# Altium PCB A4.PcbDoc (part 1 of 2)
Units mil, origin at the board's own origin, x right, y up, seen from the top; angles counter-clockwise.
Board outline 3937.01 x 3149.61 mil, 2 copper layers (Top Layer, Bottom Layer); 93 components, 53 nets, 268 pads, 22 vias.
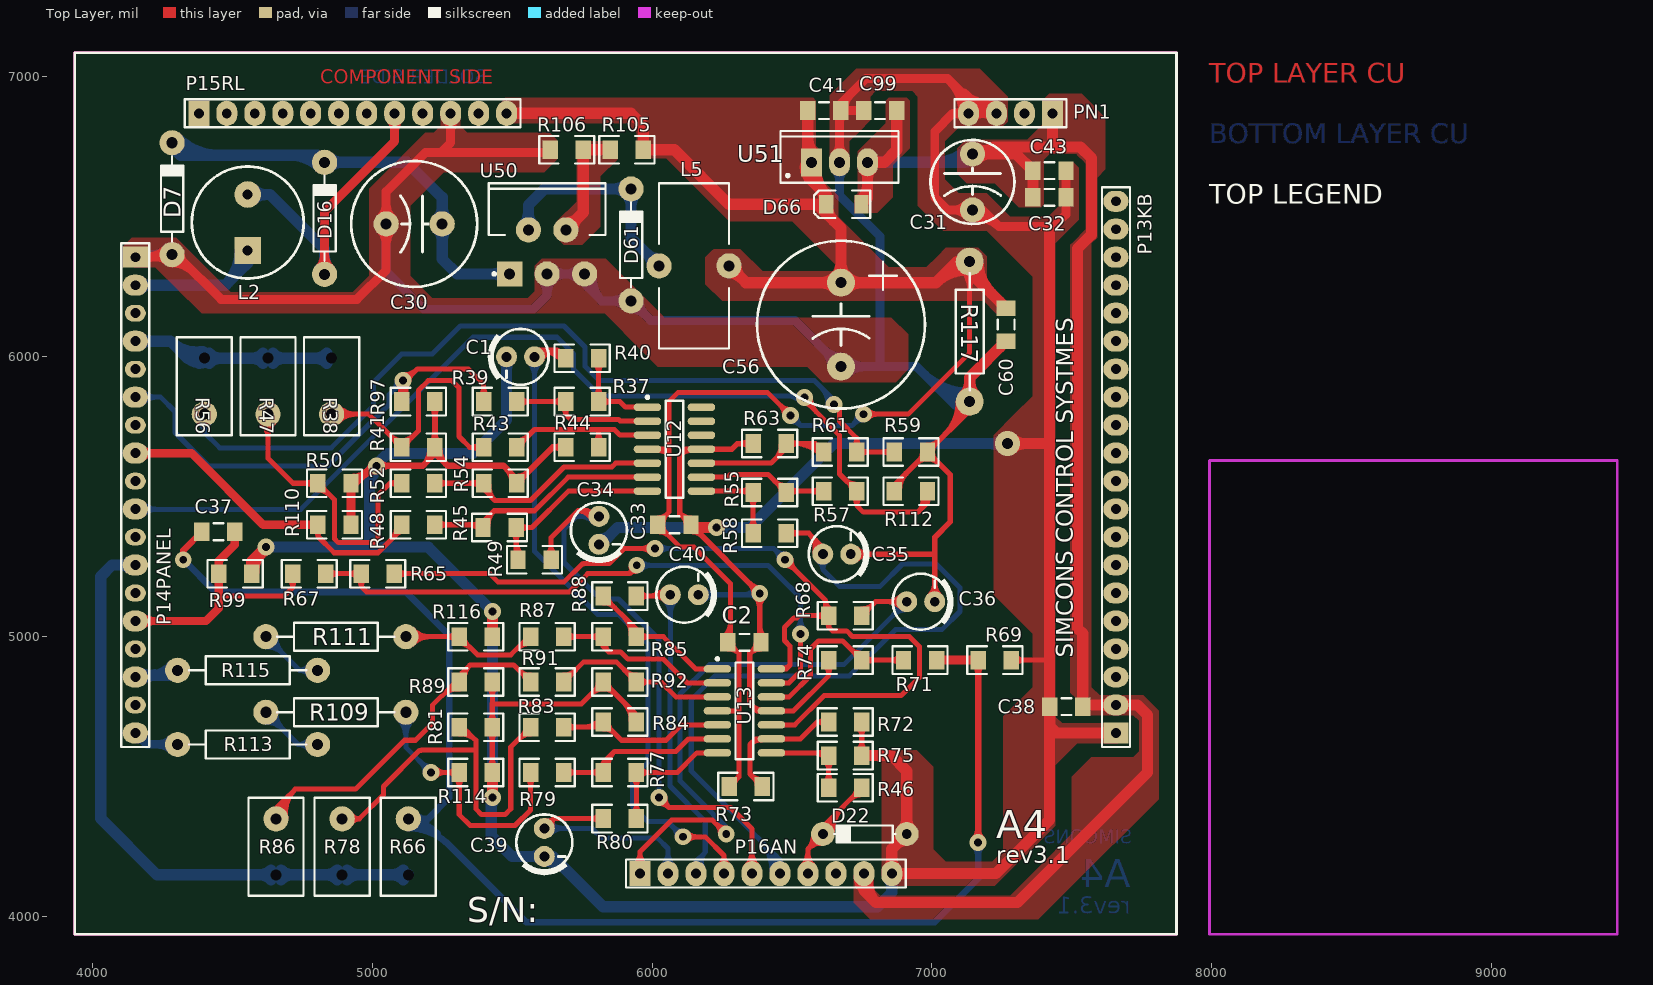
[diagram p0: Top Layer view]
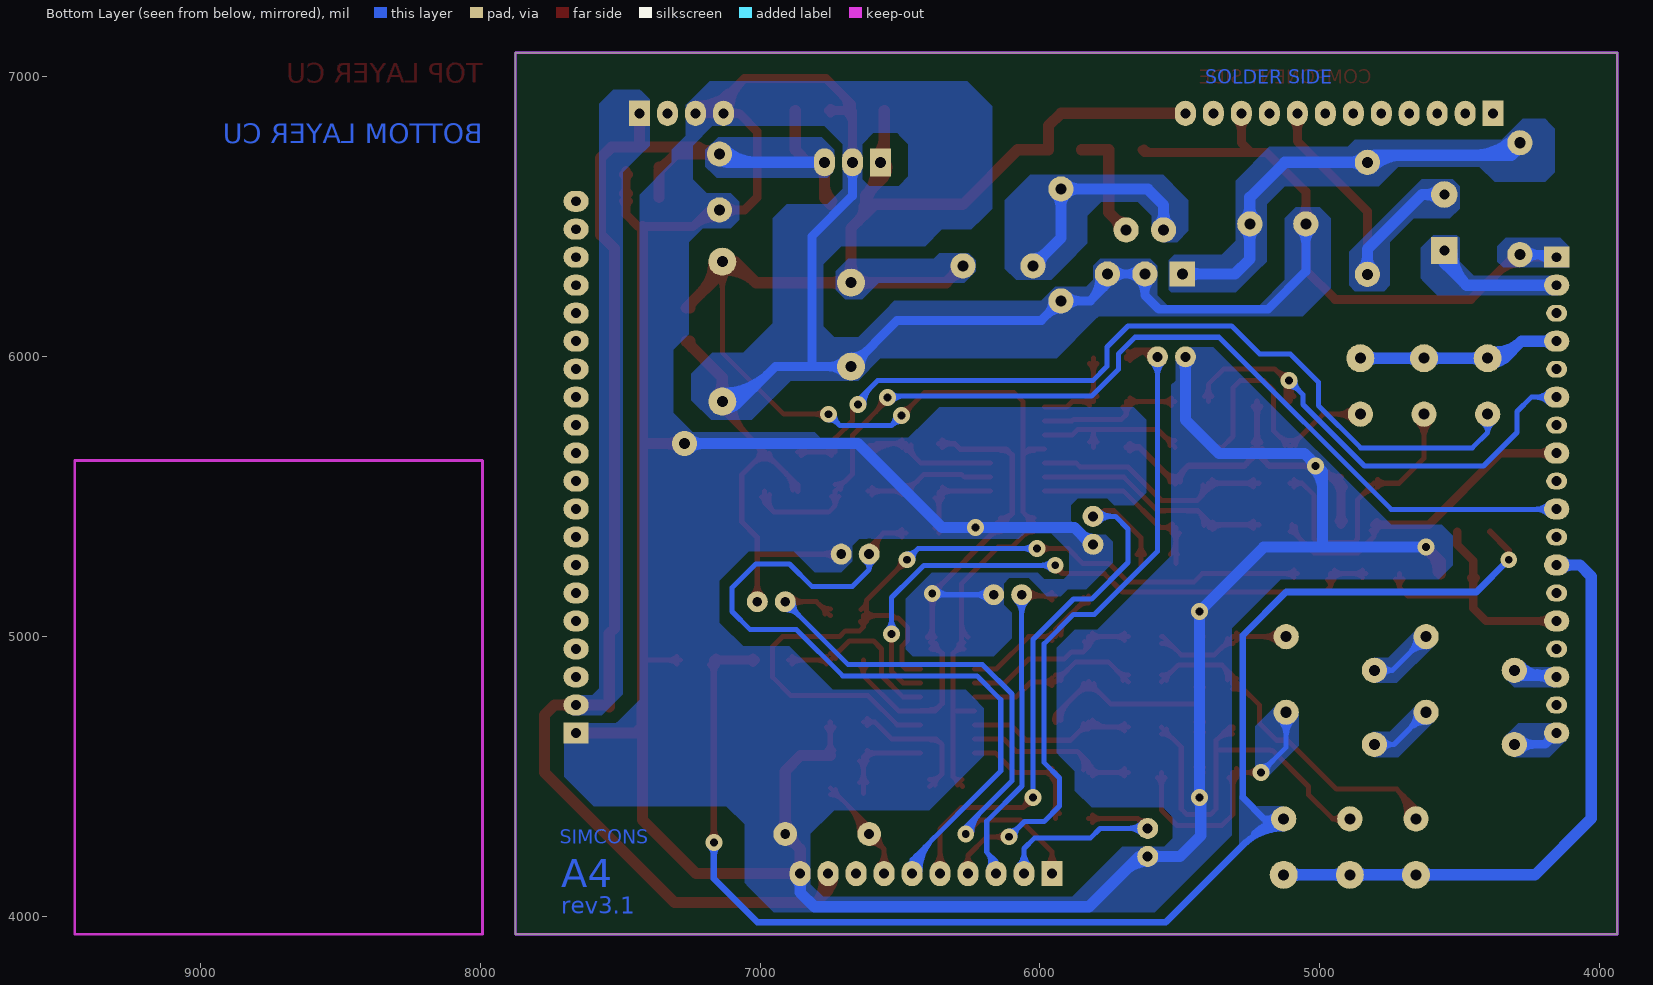
[diagram p1: Bottom Layer view, seen from below]

## Layer stack, top to bottom
Top Solder: solder mask 0.4, Solder Resist, Dk 3.5
Top Layer: signal copper 1.4
Dielectric1: dielectric 12.6, FR-4, Dk 4.8
Bottom Layer: signal copper 1.4
Bottom Solder: solder mask 0.4, Solder Resist, Dk 3.5

## Board outline
3937.01,3937.01 7874.02,3937.01 7874.02,7086.61 3937.01,7086.61

## Design rules (kind name [scope] priority, off if disabled: settings)
Clearance [All] p1: gap=18 ignorepadtopadclearanceinfootprint=FALSE except(0: Arc-Hole Track-Hole SMDPad-Hole THPad-Hole Via-Hole Fill-Hole Poly-Hole Region-Hole Text-Hole)
ComponentClearance [All] p1 off: gap=10 collisioncheckmode=3 verticalgap=10 showdistances=FALSE
Height [All] p1 off: minheight=0 maxheight=1000 prefheight=500
MinimumSolderMaskSliver [All] p1: minsoldermaskwidth=0
PlaneConnect [All] p1: planeconnectstyle=Relief reliefexpansion=20 reliefentries=4 reliefconductorwidth=22 reliefairgap=8
PolygonConnect [All] p1: connectstyle=Direct reliefconductorwidth=10 reliefentries=4 polygonreliefangle="90 Angle" airgapwidth=10
RoutingVias [All] p1: holewidth=35.43 width=60 viastyle="Through Hole" minholewidth=28 minwidth=60 maxholewidth=59.06 maxwidth=90
SilkToSilkClearance [All] p1: silktosilkclearance=0
SilkToSolderMaskClearance SilkscreenOverComponentPads [IsPad] p1: minsilkscreentomaskgap=0 clearancetoexposedcopper=TRUE
SolderMaskExpansion [All] p1: expansion=4
Width [All] p1: maxlimit=40 minlimit=18 preferedwidth=18
24 further rules are at their usual default settings.

## Classes and differential pairs
component class SUPPLY: "1K 1206" C30 C31 C32 C43 C56 C60 C99 D7 D16 D61 D66 L2 L5 R105 R106 R117 U50 U51
component class BOTTOM: C41 P13KB P14PANEL P15RL P16AN PN1
component class AC: C1 C33 C34 C35 R37 R38 R39 R40 R41 R43 R44 R45 R47 R48 R49 R50 R52 R54 R55 R56 R57 R58 R59 R61 R63 R97 R110 R112 U12
component class AC2: C2 C36 C37 C38 C39 C40 D22 R46 R65 R66 R67 R68 R69 R71 R72 R73 R74 R75 R77 R78 R79 R80 R81 R83 R84 R85 R86 R87 R88 R89 R91 R92 R99 R109 R111 R113 R114 R115 R116 U13

## Components (designator, comment, footprint, x,y, rotation, side; value= is the part's Value field where it differs from the comment)
C1 "10uF/63V" CAP_.1 5530,6000 r270 top value=100pF
C2 ".1uF 1206" C1206VW 6330,4980 r180 top value=100pF
C30 "Cap Electrolitic 1000uF/50V" CAP_.2-2 5150,6475 r270 top value=330uF
C31 "Cap Electrolytic 470uF/16V" CAP_.2 7145,6625 r0 top value=100uF
C32 ".1uF 1206" C1206VW 7420,6570 r180 top value=100nF
C33 ".1uF 1206" C1206VW 6080,5400 r180 top value=100pF
C34 "10uF/63V" CAP_.1 5810,5380 r0 top value=100pF
C35 "10uF/63V" CAP_.1 6660,5295 r90 top value=100pF
C36 "10uF/63V" CAP_.1 6960,5125 r90 top value=100pF
C37 "22nF 1206" C1206VW 4450,5375 r0 top value=100pF
C38 ".1uF 1206" C1206VW 7480,4750 r0 top value=100pF
C39 "10uF/63V" CAP_.1 5615,4265 r0 top value=100pF
C40 "10uF/63V" CAP_.1 6115,5150 r90 top value=100pF
C41 ".1uF 1206" C1206VW 6615,6880 r180 top value=100pF
C43 "1uF 1206" C1206VW 7420,6665 r180 top value=100nF
C56 "Cap Electrolitic 3300uF/16V" CAP_.3 6675,6115 r0 top value=330uF
C60 ".1uF 1206" C1206VW 7265,6115 r90 top value=100nF
C99 ".1uF 1206" C1206VW 6815,6880 r0 top value=100pF
D7 "P6KE33A x 2" DIODE1A 4285,6565 r90 top
D16 "1N4007" DIODE1A 4830,6495 r90 top
D22 "D Zener 4.7V .25W" "DZENOR .25W" 6760,4295 r180 top
D61 "1N5819" DIODE1A 5925,6400 r90 top
D66 "1N4148 SMD" 4148SMD 6685,6545 r0 top
L2 "Inductor 220uH" INDUCTOR 4555,6480 r180 top value=4.7mH
L5 "Inductor Toroid 1mH" INDUCTORTOROID 6150,6325 r90 top value=10mH
P13KB "Header 20" HDR1X20_BURGE_F 7657.48,4655.91 r90 top locked
P14PANEL "Header 18" HDR1X18_BURGE_F 4153.54,6355.91 r270 top locked
P15RL "Header 12" HDR1X12_BURGE_F 4380.31,6870.08 r0 top locked
P16AN "Header 10" HDR1X10_BURGE_F 5956.69,4153.54 r0 top locked
PN1 "Header 4" HDR1X4_BURGE_F 7430.71,6870.08 r180 top locked
R37 "1M 1206" R1206VW 5750,5840 r180 top value=1k
R38 "1M MFR" RES_RAD_1W 4855,5795 r270 top value=1M
R39 "220K 1206" R1206VW 5457.5,5840 r180 top value=1k
R40 "33K 1206" R1206VW 5750,5995 r0 top value=1k
R41 "4.7K 1206" R1206VW 5165,5676.67 r0 top value=1k
R43 "220K 1206" R1206VW 5457.5,5676.67 r180 top value=1k
R44 "1M 1206" R1206VW 5750,5676.67 r0 top value=1k
R45 "1M 1206" R1206VW 5455,5390 r180 top value=1k
R46 "470E 1206" R1206VW 6690,4460 r0 top value=1k
R47 "1M MFR" RES_RAD_1W 4627.5,5795 r270 top value=1M
R48 "220K 1206" R1206VW 5165,5400 r180 top value=1k
R49 "33K 1206" R1206VW 5580,5275 r180 top value=1k
R50 "4.7K 1206" R1206VW 4865,5548.33 r0 top value=1k
R52 "220K 1206" R1206VW 5165,5548.33 r180 top value=1k
R54 "1M 1206" R1206VW 5457.5,5548.33 r180 top value=1k
R55 "1M 1206" R1206VW 6420,5515 r0 top value=1k
R56 "1M MFR" RES_RAD_1W 4400,5795 r270 top value=1M
R57 "220K 1206" R1206VW 6672.5,5520 r0 top value=1k
R58 "33K 1206" R1206VW 6420,5370 r180 top value=1k
R59 "4.7K 1206" R1206VW 6925,5660 r0 top value=1k
R61 "220K 1206" R1206VW 6672.5,5660 r0 top value=1k
R63 "1M 1206" R1206VW 6420,5690 r0 top value=1k
R65 "1M 1206" R1206VW 5020,5225 r180 top value=1k
R66 "1M MFR" RES_RAD_1W 5128.82,4349.13 r90 top value=1M
R67 "220K 1206" R1206VW 4775,5225 r180 top value=1k
R68 "33K 1206" R1206VW 6690,5075 r180 top value=1k
R69 "4.7K 1206" R1206VW 7225,4916.25 r0 top value=1k
R71 "220K 1206" R1206VW 6957.5,4916.25 r0 top value=1k
R72 "1K 1206" R1206VW 6690,4695 r0 top value=1k
R73 "10K 1206" R1206VW 6335,4465 r0 top value=1k
R74 "1M 1206" R1206VW 6690,4916.25 r0 top value=1k
R75 "10K 1206" R1206VW 6690,4575 r0 top value=1k
R77 "1M 1206" R1206VW 5885,4515 r180 top value=1k
R78 "1M MFR" RES_RAD_1W 4892.6,4349.13 r90 top value=1M
R79 "220K 1206" R1206VW 5625,4515 r180 top value=1k
R80 "33K 1206" R1206VW 5885,4350 r0 top value=1k
R81 "4.7K 1206" R1206VW 5370,4676.67 r0 top value=1k
R83 "220K 1206" R1206VW 5625,4676.67 r180 top value=1k
R84 "1M 1206" R1206VW 5885,4695 r180 top value=1k
R85 "1M 1206" R1206VW 5885,5000 r180 top value=1k
R86 "1M MFR" RES_RAD_1W 4656.38,4349.13 r90 top value=1M
R87 "220K 1206" R1206VW 5625,5000 r180 top value=1k
R88 "33K 1206" R1206VW 5885,5145 r180 top value=1k
R89 "4.7K 1206" R1206VW 5370,4838.33 r0 top value=1k
R91 "220K 1206" R1206VW 5625,4838.33 r180 top value=1k
R92 "1M 1206" R1206VW 5885,4838.33 r0 top value=1k
R97 "4.7K 1206" R1206VW 5165,5840 r180 top value=100
R99 "4.7K 1206" R1206VW 4510,5225 r180 top value=100
R105 "18K 1206" R1206VW 5910,6740 r0 top value=1K
R106 "4.7K 1206" R1206VW 5695,6740 r0 top value=1.1K
R109 "MFR 1M .5W" AXIAL-0.5#1 4870,4730 r0 top value=100K
R110 "4.7K 1206" R1206VW 4865,5400 r180 top value=100
R111 "MFR 1M .5W" AXIAL-0.5#1 4870,5000 r0 top value=100K
R112 "4.7K 1206" R1206VW 6925,5520 r0 top value=100
R113 "MFR 1M .5W" AXIAL-0.5#1 4555,4615 r0 top value=100K
R114 "4.7K 1206" R1206VW 5370,4515 r180 top value=100
R115 "MFR 1M .5W" AXIAL-0.5#1 4555,4880 r0 top value=100K
R116 "4.7K 1206" R1206VW 5370,5000 r180 top value=100
R117 "MFR 220E .5W" AXIAL-0.5#2 7135,6090 r90 top value=1K
U12 "LM324AD" D014_M 6080,5670 r0 top
U13 "LM324AD" D014_M 6330,4735 r0 top
U50 "LM2576T-ADJ" T05D 5625,6375 r0 top
U51 "LM2940CT-5.0" T03B 6670,6695 r0 top

## Footprints (in the part's own frame and the unit in brackets; to place one, negate y for a bottom-side part, rotate by r counter-clockwise, add the part's x,y. Pads: shape width x height; smd on the part's side, far side on the other; paste and mask are expansions set on the pad)
4148SMD [mm] "Diode 250mA"
  rect 1.3x1.7 smd: 1(1.6,0) 2(-1.6,0)
  silkscreen extent -2.7,-1.25 2.4,1.25, body extent -1.78,-0.76 1.91,0.76, height 1.52
AXIAL-0.5#1 [mil] "Axial Device, Thru-Hole; 2 Leads; 0.5 in Pin Spacing"
  round 90 hole 39.37: 1(-250,0) 2(250,0)
  silkscreen extent -210,-50 210,50, body extent -270,-51 270,51, height 106
AXIAL-0.5#2 [mil] "Axial Device, Thru-Hole; 2 Leads; 0.5 in Pin Spacing"
  round 100 hole 39.37: 1(-250,0) 2(250,0)
  silkscreen extent -210,-50 210,50, body extent -270,-51 270,51, height 106
C1206VW [mm] "Chip Capacitor, Body 3.2x1.6mm, IPC High Density"
  rect 1.4x1.7 smd: 1(-1.5,0) 2(1.5,0)
  silkscreen extent -0.44,-0.76 0.44,0.76, body extent -1.6,-0.8 1.6,0.8, height 1
CAP_.1 [mm]
  round 1.905 hole 0.9: 1(0,1.27) 2(0,-1.27)
  silkscreen extent -2.54,-2.79 2.54,2.54, body extent -2.54,-2.54 2.54,2.54, height 12.7
CAP_.2 [mil]
  round 90 hole 39.37: 1(0,100) 2(0,-100)
  silkscreen extent -150,-150 150,150, body extent -157,-157 157,157, height 462
CAP_.2-2 [mil]
  round 90 hole 39.37: 1(0,100) 2(0,-100)
  silkscreen extent -225,-225 225,225, body extent -199,-200 199,198, height 520
CAP_.3 [mm]
  round 2.54 hole 1: 1(0,3.81) 2(0,-3.81)
  silkscreen extent -7.62,-7.62 7.62,7.62, body extent -8.23,-8.25 8.23,8.23, height 26.2
D014_M [mm] "SOIC, 14-Leads, Body 8.7x3.9mm, Pitch 1.27mm, IPC Low Density"
  oval 2.5x0.7 smd: 1(-2.45,3.81) 2(-2.45,2.54) 3(-2.45,1.27) 4(-2.45,0) 5(-2.45,-1.27) 6(-2.45,-2.54) 7(-2.45,-3.81) 8(2.45,-3.81) 9(2.45,-2.54) 10(2.45,-1.27) 11(2.45,0) 12(2.45,1.27) 13(2.45,2.54) 14(2.45,3.81)
  silkscreen extent -2.57,-4.4 0.8,4.83, body extent -2.92,-4.28 2.88,4.27, height 1.75
DIODE1A [mil] "DIODE 1 AMPERE"
  round 90 hole 39.37: 1(-200,0) 2(200,0)
  silkscreen extent -152,-40 152,40, body extent -216,-39 216,39, height 82
"DZENOR .25W" [mil] "Axial Device, Thru-Hole; 2 Leads; 0.3 in Pin Spacing"
  round 85 hole 35.43: 1(-150,0) 2(150,0)
  silkscreen extent -109,-30 109,30, body extent -164,-35 163,35, height 74
HDR1X4_BURGE_F [mil] "Connector; Header; 4 Position"
  rect 75x90 hole 35.43: 1(0,0)
  oval 75x90 hole 35.43: 2(100,0) 3(200,0) 4(300,0)
  silkscreen extent -50,-50 350,50, body extent -50,-50 350,50, height 237
HDR1X10_BURGE_F [mil] "Connector; Header; 10 Position"
  rect 75x90 hole 35.43: 1(0,0)
  oval 75x90 hole 35.43: 2(100,0) 3(200,0) 4(300,0) 5(400,0) 6(500,0) 7(600,0) 8(700,0) 9(800,0) 10(900,0)
  silkscreen extent -50,-50 950,50, body extent -50,-50 950,50, height 237
HDR1X12_BURGE_F [mil] "Connector; Header; 12 Position"
  rect 75x90 hole 35.43: 1(0,0)
  oval 75x90 hole 35.43: 2(100,0) 3(200,0) 4(300,0) 5(400,0) 6(500,0) 7(600,0) 8(700,0) 9(800,0) 10(900,0) 11(1000,0) 12(1100,0)
  silkscreen extent -50,-50 1150,50, body extent -50,-50 1150,50, height 237
HDR1X18_BURGE_F [mil] "Connector; Header; 18 Position"
  rect 75x90 hole 35.43: 1(0,0)
  oval 75x90 hole 35.43: 2(100,0) 4(300,0) 6(500,0) 8(700,0) 10(900,0) 12(1100,0) 14(1300,0) 16(1500,0) 18(1700,0)
  oval 60x75 hole 35.43: 3(200,0) 5(400,0) 7(600,0) 9(800,0) 11(1000,0) 13(1200,0) 15(1400,0) 17(1600,0)
  silkscreen extent -50,-50 1750,50, body extent -50,-50 1750,50, height 237
HDR1X20_BURGE_F [mil] "Connector; Header; 20 Position"
  rect 75x90 hole 35.43: 1(0,0)
  oval 75x90 hole 35.43: 2(100,0) 3(200,0) 4(300,0) 5(400,0) 6(500,0) 7(600,0) 8(700,0) 9(800,0) 10(900,0) 11(1000,0) 12(1100,0) 13(1200,0) 14(1300,0) 15(1400,0) 16(1500,0) 17(1600,0) 18(1700,0) 19(1800,0) 20(1900,0)
  silkscreen extent -50,-50 1950,50, body extent -50,-50 1950,50, height 237
INDUCTOR [mil] "IRON CORE INDUCTOR"
  rect 95x95 hole 35.43: 1(0,100)
  round 95 hole 35.43: 2(0,-100)
  silkscreen extent -200,-200 200,200, body extent -197,-197 197,197, height 478
INDUCTORTOROID [mil] "TOROID INDUCTOR"
  round 90 hole 39.37: 1(0,125) 2(0,-125)
  silkscreen extent -295,-125 295,125, body extent -339,-132 344,132, height 140
R1206VW [mm] "Chip Capacitor, Body 3.2x1.6mm, IPC High Density"
  rect 1.4x1.7 smd: 1(-1.5,0) 2(1.5,0)
  silkscreen extent -2.5,-1.25 2.5,1.25, body extent -1.59,-0.77 1.59,0.77, height 0.63
RES_RAD_1W [mil]
  round 0 / inner round 90 / far side round 100 hole 39.37: 1(-200,0)
  round 90 hole 39.37: 2(0,0)
  silkscreen extent -275,-98 75,98, body extent -302,-102 102,102, height 811
T03B [mm] "TO, Thru-Hole, Vertical, Heatsink Mounted; 3 In-Line Leads; Pitch 2.54 mm"
  rect 1.905x2.54 hole 1: 1(-2.54,0)
  oval 1.905x2.54 hole 1: 2(0,0) 3(2.54,0)
  silkscreen extent -5.35,-1.85 5.35,2.85, body extent -5.4,-1.9 5.4,2.9, height 19.4
T05D [mm] "TO, Thru-Hole, Vertical, Heatsink Mounted; 5 Bent Staggered Leads; Body 10.3x8.6x4.6mm, Pitch 1.7 mm"
  rect 2.286x2.286 hole 1: 1(-3.4,-2)
  round 2.286 hole 1: 2(-1.7,2) 3(0,-2) 4(1.7,2) 5(3.4,-2)
  silkscreen extent -5.3,-2.12 5.3,6.23, body extent -5.35,-2.31 5.35,6.28, height 21.1

## Part data
C1 C34 C35 C36 C39 C40: library part "Cap Pol1", "Polarized Capacitor (Radial)", LatestRevisionDate=17-Jul-2002, LatestRevisionNote="Re-released for DXP Platform.", PackageDescription="Polarized Capacitor (Radial); 2 Leads", PackageReference=RB7.6-15, Published=8-Jun-2000, Publisher="Altium Limited"
C2 C32 C33 C37 C38 C41 C43 C99: library part Cap, "Capacitor", LatestRevisionDate=17-Jul-2002, LatestRevisionNote="Re-released for DXP Platform.", PackageDescription="Radial Cap, Thru-Hole; 2 Leads; 0.3 in Pin Spacing", PackageReference=RAD-0.3, Published=8-Jun-2000, Publisher="Altium Limited"
C30 C31 C56: library part Cap2, "Capacitor", PackageReference=CAPR5-4X5, Published=23-Sep-2002, Publisher="Altium Limited"
C60: library part CAP, "Capacitor", LatestRevisionDate=17-Jul-2002, LatestRevisionNote="Re-released for DXP Platform.", PackageDescription="Radial Cap, Thru-Hole; 2 Leads; 0.3 in Pin Spacing", PackageReference=RAD-0.3, Published=8-Jun-2000, Publisher="Altium Limited"
D7 D16: library part "Diode 1N5408", "3 Amp Medium Power Silicon Rectifier Diode", ComponentLink1Description="Manufacturer Link", ComponentLink1URL=http://www.irf.com/, DatasheetVersion=Aug-1984, LatestRevisionDate=17-Jul-2002, LatestRevisionNote="Re-released for DXP Platform.", PackageDescription="Diode, Axial; Body 9.5 x 5.3 mm (LxDia. max), Lead Dia. 1.32 mm (max)", PackageReference=DO-201AD, Published=8-Jun-2000, Publisher="Altium Limited"
D22: library part "D Zener", "Zener Diode", LatestRevisionDate=17-Jul-2002, LatestRevisionNote="Re-released for DXP Platform.", PackageDescription="Diode, Thru-Hole; 2 Leads; 0.7 in Pin Spacing", PackageReference=DIODE-0.7, Published=8-Jun-2000, Publisher="Altium Limited"
D61: library part 1N5221B, "Silicon Zener Diode (0.3 to 0.5W)", Code_JEDEC=DO-204-AH, ComponentLink1Description="Manufacturer Link", ComponentLink1URL=http://www.vishay.com/, ComponentLink2Description=Datasheet, ComponentLink2URL=http://www.vishay.com/docs/85588/85588.pdf, DatasheetDocument=6-Aug-1999, LatestRevisionDate=17-Jul-2002, LatestRevisionNote="Re-released for DXP Platform.", PackageReference=DO-35, Published=8-Jun-2000, Publisher="Altium Limited"
D66: library part "Diode 1N5408", "Small Signal Fast Switching Diode", ComponentLink1Description="Manufacturer Link", ComponentLink1URL=http://www.irf.com/, DatasheetVersion=Aug-1984, LatestRevisionDate=17-Jul-2002, LatestRevisionNote="Re-released for DXP Platform.", PackageDescription="Diode, Axial; Body 9.5 x 5.3 mm (LxDia. max), Lead Dia. 1.32 mm (max)", PackageReference=DO-201AD, Published=8-Jun-2000, Publisher="Altium Limited"
L2 L5: library part Inductor, "Inductor", Code_IEC=1005, Code_JEITA=0402, LatestRevisionDate=29-May-2009, LatestRevisionNote="IPC-7351 Footprint Added.", PackageDescription="Chip Inductor", PackageReference=0402-A, Published=8-Jun-2000, Publisher="Altium Limited"
P13KB: "Header, 20-Pin", LatestRevisionDate=17-Jul-2002, LatestRevisionNote="Re-released for DXP Platform.", Publisher="Altium Limited"
P14PANEL: "Header, 18-Pin", LatestRevisionDate=17-Jul-2002, LatestRevisionNote="Re-released for DXP Platform.", Publisher="Altium Limited"
P15RL: "Header, 12-Pin", LatestRevisionDate=17-Jul-2002, LatestRevisionNote="Re-released for DXP Platform.", Publisher="Altium Limited"
P16AN: "Header, 10-Pin", LatestRevisionDate=17-Jul-2002, LatestRevisionNote="Re-released for DXP Platform.", Publisher="Altium Limited"
PN1: "Header, 4-Pin", LatestRevisionDate=17-Jul-2002, LatestRevisionNote="Re-released for DXP Platform.", Publisher="Altium Limited"
R37 R38 R39 R40 R41 R43 R44 R45 R46 R47 R48 R49 R50 R52 R54 R55 R56 R57 R58 R59 R61 R63 R65 R66 R67 R68 R69 R71 R72 R73 R74 R75 R77 R78 R79 R80 R81 R83 R84 R85 R86 R87 R88 R89 R91 R92 R97 R99 R109 R110 R111 R112 R113 R114 R115 R116 R117: library part "Res Semi", "Semiconductor Resistor", LatestRevisionDate=17-Jul-2002, LatestRevisionNote="Re-released for DXP Platform.", PackageDescription="Axial Device, Thru-Hole; 2 Leads; 0.5 in Pin Spacing", PackageReference=AXIAL-0.5, Published=8-Jun-2000, Publisher="Altium Limited"
R105 R106: library part "Res SMT", "Semiconductor Resistor", LatestRevisionDate=17-Jul-2002, LatestRevisionNote="Re-released for DXP Platform.", PackageDescription="Axial Device, Thru-Hole; 2 Leads; 0.5 in Pin Spacing", PackageReference=AXIAL-0.5, Published=8-Jun-2000, Publisher="Altium Limited"
U12 U13: "Quadruple Operational Amplifier", Code_IPC=SOIC127P600-14, ComponentLink1Description="Manufacturer Link", ComponentLink1URL=http://www.ti.com/, ComponentLink2Description=Datasheet, ComponentLink2URL=http://www-s.ti.com/sc/ds/lm324.pdf, DatasheetVersion=Jan-1989, LatestRevisionDate=13-Apr-2006, LatestRevisionNote="IPC-7351 Footprint Added.", PackageDescription="14-Pin Small Outline Integrated Circuit 1.27 mm Pitch", PackageReference=D014, PackageVersion=Jan-1998, Published=15-Apr-2002, Publisher="Altium Limited"
U50: "SIMPLE SWITCHER® 3A Step-Down Voltage Regulator, 5-pin TO-220", Manufacturer="National Semiconductor", PackageTopMarking="NSUZXYTTE#*LM2576T*-ADJ P+", PowerWise=N, Supplier Part Number 1=9488146, Code_JEDEC=TO-220-AB, ComponentLink1Description="LM2576 Datasheet", ComponentLink1URL=http://www.national.com/ds/LM/LM2576.pdf, ComponentLink2Description="LM2576 Web Page", ComponentLink2URL=http://www.national.com/pf/LM/LM2576.html, ComponentLink3Description="T05A Package Page", ComponentLink3URL=http://www.national.com/packaging/folders/t05a.html, CompType=Switcher, DatasheetVersion=Aug-2004, PackageDescription="TO-220, Molded, 5 Lead, Straight", PackageReference=T05A, PackageVersion="revJ, Jan-1992", PartNumber=LM2576T-ADJ, PinCount=5, Published=4-Dec-2008, Publisher="Altium Limited", RoHS=N, Supplier 1=Farnell
U51: "1A Low Dropout Regulator, 3-pin TO-220", Manufacturer="National Semiconductor", PackageTopMarking="NSUZXYTTE#*LM2940CT*-5.0 P+", PowerWise=N, Supplier Part Number 1=9490191, ComponentLink1Description="LM2940C Datasheet", ComponentLink1URL=http://www.national.com/ds/LM/LM2940C.pdf, ComponentLink2Description="LM2940C Web Page", ComponentLink2URL=http://www.national.com/pf/LM/LM2940C.html, ComponentLink3Description="T03B Package Page", ComponentLink3URL=http://www.national.com/packaging/folders/t03b.html, CompType="LDO IC", DatasheetVersion=Jan-2007, PackageDescription="TO-220, Molded, 3 Lead, Straight", PackageReference=T03B, PackageVersion="revL, Jan-1992", PartNumber=LM2940CT-5.0, PinCount=3, Published=4-Dec-2008, Publisher="Altium Limited", RoHS=N, Supplier 1=Farnell, Supplier 2=Farnell, Supplier Part Number 2=1523853

## Via types
v1: diameter 60, hole 28, Top Layer to Bottom Layer, 21 vias
v2: diameter 90, hole 39.37, Top Layer to Bottom Layer, 1 vias

## Nets (pads, with @x,y where several pads share a name; then routed paths per layer and width w, separated by ;. In a path a pad name is that pad's centre, name@x,y a point inside that pad or via, vN(x,y) a via of type N, cw(c..) or ccw(c..) an arc to the next point about the centre after c; other vN are vias at no path point)
+9V: C2.2 C33.2 C41.2 C56.1 C60.2 D66.2 L5.2 P15RL.12 R73.1 R105.2 R117.2 U12.4 U13.4 U51.1 | length 8629.3
  Top Layer w18: U12.4@5983.54,5670 6040,5670 6059.76,5650.24 ; U12.4@6019.34,5665.23 cw(c6023.22,5613.71) 6059.75,5650.25 ; C33.2@6020.94,5375.54 cw(c6020.94,5316.47) 6062.71,5358.24 ; C33.2@6020.94,5424.46 ccw(c6020.94,5469.18) 6052.56,5437.56 ; C33.2@6039.5,5394.09 ccw(c6070.05,5394.09) C33.2@6048.45,5372.49 ; C33.2@6039.5,5405.91 cw(c6084.4,5405.91) 6052.65,5437.65 ; U13.4@6233.54,4735 6305,4735 6310,4740 ; C2.2@6257.82,4999.03 ccw(c6203.14,5053.71) 6280.47,5053.71 ; C2.2@6270.94,4980 C2.2@6280.47,4970.47 ; C2.2@6271.92,4955.56 cw(c6274.55,4905.5) 6310,4940.95 ; R73.1@6275.94,4465 6310,4499.06 ; R73.1@6279.06,4489.2 ccw(c6285,4524.06) 6310,4499.05 ; C2.2@6289.5,4974.09 ccw(c6320.05,4974.09) C2.2@6298.45,4952.49 ; R73.1@6294.5,4470.91 cw(c6325.05,4470.91) R73.1@6303.45,4492.51 ; v1@6474,5790 ccw(c6423.3,5790) 6459.15,5825.85 ccw(c6495,5861.7) v1@6495,5811 ; v1(6495,5790) 6412,5873 6277,5873 6250,5873 6093,5873 6059.76,5839.76 6059.76,5650.24 ; v1(6755,5795) 6915,5795 7135,6015 7135,6304.06 R117.2@7135,6340 ; v1@6769.85,5780.15 cw(c6805.7,5744.3) 6805.7,5795 cw(c6805.7,5845.7) v1@6769.85,5809.85 ; R117.2@7106.01,6311.01 cw(c7036.02,6241.02) 7135,6241.02 cw(c7233.98,6241.02) R117.2@7163.99,6311.01 ; R117.2@7118.74,6323.74 cw(c7079.47,6284.47) 7135,6284.47 cw(c7190.53,6284.47) R117.2@7151.26,6323.74 ; 6059.76,5650.24 6059.76,5444.76 6020.94,5405.94 C33.2@6020.94,5400 6100.94,5320 6150,5320 6280.47,5189.53 C2.2@6280.47,4970.47 ; C2.2@6280.47,4970.47 6310,4940.94 ; 6310,4499.06 6310,4740 ; 6310,4740 6310,4940.94
  Top Layer w40: P15RL.12@5480.32,6870.08 5924.92,6870.08 5969.06,6825.94 R105.2@5969.06,6740 6080,6740 6275,6545 6590,6545 ; P15RL.12@5492.69,6857.7 cw(c5522.56,6827.83) 5522.56,6870.08 cw(c5522.56,6912.33) P15RL.12@5492.69,6882.45 ; L5.2@6275,6300 cw(c6275,6239.64) 6317.68,6282.32 cw(c6360.36,6325) L5.2@6300,6325 ; L5.2@6275,6325 6335,6265 C56.1@6675,6265 ; U51.1@6547.69,6685.45 ccw(c6607,6677.6) 6564.7,6635.3 ; 6555.94,6783.68 ccw(c6646.18,6783.68) U51.1@6582.37,6719.87 ; C41.2@6555.94,6880 6555.94,6709.06 U51.1@6570,6695 6570,6630 D66.2@6622.01,6577.99 ; U51.1@6557.63,6670.13 cw(c6527.75,6640.25) 6570,6640.25 cw(c6612.25,6640.25) U51.1@6582.37,6670.13 ; U51.1@6587.35,6680.2 ccw(c6708.21,6664.21) D66.2@6622,6578 ; 6594.7,6605.3 cw(c6542.28,6552.87) D66.2@6616.42,6552.87 ; D66.2@6619,6541.84 cw(c6606.47,6561.47) 6590,6545 ; D66.2@6627.6,6537.13 ccw(c6699.36,6537.13) 6648.62,6486.38 ; C56.1@6653.79,6243.79 ccw(c6602.57,6192.57) 6602.57,6265 ccw(c6602.57,6337.43) 6653.79,6286.21 ccw(c6602.57,6337.43) 6675,6337.43 ccw(c6747.43,6337.43) 6696.21,6286.21 ccw(c6747.43,6337.43) 6747.43,6265 ccw(c6747.43,6192.57) C56.1@6696.21,6243.79 ; 7078.09,6328.09 cw(c7131.25,6274.93) R117.2@7135.58,6349.98 ; R117.2@7133.27,6310.05 ccw(c7124.37,6155.64) 7015,6265 ; R117.2@7135,6304.06 C60.2@7265,6174.06 ; R117.2@7135,6340 7090,6340 7015,6265 ; R117.2@7165,6340 ccw(c7324.2,6340) 7211.63,6227.43 ; C60.2@7242.01,6197.04 cw(c7219.03,6174.06) C60.2@7251.54,6174.06 ; 6590,6545 6675,6460 C56.1@6675,6265 ; 6590,6545 D66.2@6622.01,6545 D66.2@6622.01,6577.99 ; C56.1@6675,6265 7015,6265
  Bottom Layer w18: v1(6495,5790) 6530,5755 ; v1@6495.36,5769 cw(c6496.18,5721.18) 6530,5755 ; v1@6516,5789.64 ccw(c6563.82,5788.82) 6530,5755 ; v1@6734,5795 cw(c6683.3,5795) 6719.15,5759.15 cw(c6755,5723.3) v1@6755,5774 ; v1(6755,5795) 6715,5755 6530,5755
B_M: P14PANEL.10 R57.2 R112.2 | length 4128.2
  Top Layer w18: v1@6545,5834 cw(c6545,5807.44) 6563.78,5826.22 ; v1(6545,5855) 6540,5850 6670,5720 6670,5581.56 R57.2@6731.56,5520 6731.56,5468.44 6755,5445 6950,5445 ; v1@6566,5855 ccw(c6640.84,5855) 6587.92,5802.08 ; 6689.79,5561.76 ccw(c6731.56,5603.53) R57.2@6731.56,5544.46 ; R57.2@6704.05,5547.51 cw(c6682.45,5525.91) R57.2@6713,5525.91 ; R57.2@6718.43,5500.97 cw(c6686.75,5469.29) 6731.56,5469.29 cw(c6776.36,5469.29) R57.2@6744.68,5500.97 ; R112.2@6966.26,5508.84 cw(c6904.4,5490.6) 6950,5445 ; 6971.42,5466.42 ccw(c6937.49,5500.36) R112.2@6983.52,5513.94 ; R112.2@6973.63,5498.74 cw(c6960.26,5479.06) 6984.06,5479.06 ; R112.2@6984.06,5520 6984.06,5479.06 ; R112.2@6994.48,5498.74 ccw(c7007.85,5479.06) 6984.06,5479.06 ; 6950,5445 6984.06,5479.06
  Bottom Layer w18: P14PANEL.10@4153.54,5455.91 4154.45,5455 4745,5455 5360,6070 5660,6070 5720,6010 5720,5955 5815,5860 6540,5860 v1(6545,5855) ; P14PANEL.10@4181.2,5435.75 cw(c4227.66,5389.29) 4227.66,5455 ; P14PANEL.10@4181.2,5476.06 ccw(c4232.04,5526.9) 4232.04,5455 ; 6482.23,5860 cw(c6482.23,5792.23) v1@6530.15,5840.15 ; 6506.37,5860 ccw(c6506.37,5893.63) v1@6530.15,5869.85
BAT: C30.1 D7.2 D16.2 U50.1 | length 2298.1
  Bottom Layer w40: D7.2@4270,6765 4315,6720 4805,6720 D16.2@4830,6695 5125,6695 5250,6570 C30.1@5250,6475 5250,6350 5303.74,6296.26 U50.1@5491.14,6296.26 ; D7.2@4274.39,6754.39 ccw(c4357.43,6837.43) 4357.43,6720 ; D7.2@4302.68,6782.68 ccw(c4453.99,6933.99) 4453.99,6720 ; 4709.29,6720 cw(c4709.29,6574.29) D16.2@4812.32,6677.32 ; D16.2@4847.68,6677.32 cw(c4890.36,6634.64) 4890.36,6695 cw(c4890.36,6755.36) D16.2@4847.68,6712.68 ; C30.1@5232.32,6457.32 cw(c5189.64,6414.64) 5250,6414.64 cw(c5310.36,6414.64) C30.1@5267.68,6457.32 ; C30.1@5232.32,6492.68 ccw(c5189.64,6535.36) 5250,6535.36 ccw(c5310.36,6535.36) C30.1@5267.68,6492.68 ; U50.1@5473.46,6278.58 ccw(c5430.79,6235.9) 5430.79,6296.26 ccw(c5430.79,6356.62) U50.1@5473.46,6313.94
BAT+: L2.1 P14PANEL.2 | length 744.7
  Bottom Layer w40: P14PANEL.2@4153.54,6255.91 4475.91,6255.91 4555,6335 L2.1@4555,6380 ; P14PANEL.2@4173.42,6243.53 cw(c4203.29,6213.66) 4203.29,6255.91 cw(c4203.29,6298.15) P14PANEL.2@4173.42,6268.28 ; 4476.23,6256.23 ccw(c4352.47,6380) L2.1@4527.5,6380 ; 4544.52,6324.52 ccw(c4489.04,6380) L2.1@4567.5,6380
DG-B_: C36.1 P16AN.1 R68.1 | length 2765.4
  Top Layer w18: P16AN.1@5936.54,4181.2 ccw(c5887.89,4229.85) 5956.69,4229.85 ccw(c6025.5,4229.85) P16AN.1@5976.84,4181.2 ; P16AN.1@5956.69,4153.54 5956.69,4231.69 6070,4345 6215,4345 v1(6265,4295) ; v1@6244,4295 ccw(c6193.3,4295) 6229.15,4330.85 ccw(c6265,4366.7) v1@6265,4316 ; R68.1@6749.06,5075 6799.06,5125 C36.1@6910,5125 ; R68.1@6749.06,5099.46 ccw(c6749.06,5158.53) 6790.82,5116.76 ; R68.1@6767.61,5080.91 cw(c6798.16,5080.91) R68.1@6776.56,5102.51 ; C36.1@6889.85,5104.85 ccw(c6841.19,5056.19) 6841.19,5125 ccw(c6841.19,5193.81) C36.1@6889.85,5145.15
  Bottom Layer w18: 6211.47,4373.53 cw(c6132.95,4295) v1@6244,4295 ; 6242.2,4342.8 cw(c6194.4,4295) v1@6262,4295 ; v1(6265,4295) 6265,4320 6100,4485 6100,4795 6205,4900 6685,4900 C36.1@6910,5125 ; C36.1@6881.5,5125 cw(c6812.69,5125) 6861.35,5076.35 cw(c6910,5027.69) C36.1@6910,5096.5
DG-R_: C40.1 P16AN.3 R88.1 | length 1609.5
  Top Layer w18: R88.1@5944.06,5145 C40.1@6060,5145 ; R88.1@5957.18,5131.88 cw(c5988.86,5100.19) 5988.86,5145 cw(c5988.86,5189.81) R88.1@5957.18,5158.12 ; 5984.12,5145 ccw(c5984.12,5230.88) C40.1@6044.85,5170.15 ; 6008.27,5145 cw(c6008.27,5093.27) C40.1@6044.85,5129.85 ; 6027.58,5145 ccw(c6027.58,5187.42) C40.1@6057.58,5157.42
  Bottom Layer w18: C40.1@6044.85,5129.85 cw(c5996.19,5081.19) 6065,5081.19 cw(c6133.81,5081.19) C40.1@6085.15,5129.85 ; C40.1@6065,5150 6065,4810.91 6064,4809.91 6064,4466.61 6190,4340.61 6190,4230 ; P16AN.3@6156.69,4153.54 6156.69,4196.69 6190,4230 ; P16AN.3@6165.95,4166.01 cw(c6200.94,4184.78) 6172.86,4212.86 ; P16AN.3@6181.81,4174.51 cw(c6223.25,4196.74) 6190,4230
DG-Y_: C39.1 P16AN.2 R80.1 | length 1133.2
  Top Layer w18: C39.1@5615,4315 5650,4350 ; C39.1@5622.31,4342.55 ccw(c5629.68,4370.31) 5650,4350 ; C39.1@5642.55,4322.31 cw(c5670.31,4329.68) 5650,4350 ; R80.1@5812.82,4336.88 ccw(c5781.14,4305.19) 5781.14,4350 ccw(c5781.14,4394.81) R80.1@5812.82,4363.12 ; R80.1@5825.94,4350 5650,4350
  Bottom Layer w18: C39.1@5615,4315 5785,4315 5820,4280 6020,4280 6056.69,4243.31 P16AN.2@6056.69,4153.54 ; C39.1@5635.15,4294.85 cw(c5683.81,4246.19) 5683.81,4315 cw(c5683.81,4383.81) C39.1@5635.15,4335.15 ; P16AN.2@6036.54,4181.2 ccw(c5987.89,4229.85) 6056.69,4229.85 ccw(c6125.5,4229.85) P16AN.2@6076.84,4181.2
DGB: P14PANEL.16 R115.1 | length 518.2
  Bottom Layer w30: P14PANEL.16@4153.54,4855.91 4280.91,4855.91 R115.1@4305,4880 cw(c4246.83,4938.17) 4246.83,4855.91 ; P14PANEL.16@4172.29,4875.39 ccw(c4205.36,4932.66) 4222.47,4868.79 ; P14PANEL.16@4174.41,4855.91 ccw(c4174.41,5010.59) R115.1@4283.79,4901.21 ; P14PANEL.16@4176.95,4840 cw(c4215.36,4801.59) 4215.36,4855.91 cw(c4215.36,4910.23) P14PANEL.16@4176.95,4871.82 ; P14PANEL.16@4180.53,4844.66 cw(c4217.35,4823.4) 4206.34,4864.46
DGN: P14PANEL.12 R66.1 R78.1 R86.1 | length 2727.9
  Bottom Layer w40: P14PANEL.12@4133.67,5243.53 ccw(c4103.8,5213.66) 4103.8,5255.91 ccw(c4103.8,5298.15) P14PANEL.12@4133.67,5268.28 ; P14PANEL.12@4153.54,5255.91 4070.91,5255.91 4030,5215 4030,4350 4230.87,4149.13 R86.1@4656.38,4149.13 R78.1@4892.6,4149.13 R66.1@5128.82,4149.13 ; R86.1@4638.7,4131.46 ccw(c4596.02,4088.78) 4596.02,4149.13 ccw(c4596.02,4209.49) R86.1@4638.7,4166.81 ; R86.1@4674.06,4131.46 cw(c4716.73,4088.78) 4716.73,4149.13 cw(c4716.73,4209.49) R86.1@4674.06,4166.81 ; R78.1@4874.92,4131.46 ccw(c4832.24,4088.78) 4832.24,4149.13 ccw(c4832.24,4209.49) R78.1@4874.92,4166.81 ; R78.1@4910.28,4131.46 cw(c4952.95,4088.78) 4952.95,4149.13 cw(c4952.95,4209.49) R78.1@4910.28,4166.81 ; R66.1@5111.14,4131.46 ccw(c5068.46,4088.78) 5068.46,4149.13 ccw(c5068.46,4209.49) R66.1@5111.14,4166.81
DGR_M: C37.2 P14PANEL.14 R67.2 R99.2 | length 1235.7
  Top Layer w18: 4450.94,5145 4685,5145 4715.94,5175.94 ; R67.2@4703.18,5205.62 cw(c4675.06,5175.95) 4715.94,5175.95 ; R67.2@4715.94,5225 4715.94,5175.94 ; R67.2@4728.71,5205.62 ccw(c4756.82,5175.95) 4715.94,5175.95
  Top Layer w30: P14PANEL.14@4153.54,5055.91 4405.91,5055.91 4450.94,5100.94 4450.94,5145 R99.2@4450.94,5225 4450.94,5270.94 4509.06,5329.06 C37.2@4509.06,5375 ; P14PANEL.14@4176.95,5040 cw(c4215.36,5001.59) 4215.36,5055.91 cw(c4215.36,5110.23) P14PANEL.14@4176.95,5071.82 ; R99.2@4442.06,5210.21 cw(c4420.62,5188.77) 4450.94,5188.77 ; R99.2@4442.06,5210.21 cw(c4420.62,5188.77) 4450.94,5188.77 ; R99.2@4442.06,5210.21 cw(c4420.62,5188.77) 4450.94,5188.77 ; 4450.94,5188.77 cw(c4481.26,5188.77) R99.2@4459.82,5210.21 ; 4450.94,5188.77 cw(c4481.26,5188.77) R99.2@4459.82,5210.21 ; 4450.94,5188.77 cw(c4481.26,5188.77) R99.2@4459.82,5210.21
DGY: P14PANEL.18 R113.1 | length 350.6
  Bottom Layer w30: P14PANEL.18@4153.54,4655.91 4194.45,4615 ; P14PANEL.18@4161.04,4633.41 cw(c4161.04,4597.19) 4186.65,4622.8 ; P14PANEL.18@4183.15,4651.7 ccw(c4223.48,4644.03) 4194.45,4615 ; R113.1@4283.79,4593.79 ccw(c4232.57,4542.57) 4232.57,4615 ccw(c4232.57,4687.43) R113.1@4283.79,4636.21 ; R113.1@4305,4615 4194.45,4615
EB-B_: C35.1 P16AN.6 R58.1 | length 3357.7
  Top Layer w18: R58.1@6479.06,5370 6560,5370 ; R58.1@6492.18,5356.88 cw(c6523.86,5325.19) 6523.86,5370 cw(c6523.86,5414.81) R58.1@6492.18,5383.12 ; C35.1@6581.95,5300.03 ccw(c6504.02,5314.01) 6560,5370 ; 6584.36,5345.64 cw(c6545.33,5306.6) C35.1@6599.67,5296.85 ; C35.1@6610,5295 6610,5320 6560,5370
  Bottom Layer w18: 6378.15,4281.85 cw(c6257.35,4161.04) P16AN.6@6428.19,4161.04 ; 6408.88,4251.12 cw(c6318.81,4161.04) P16AN.6@6446.19,4161.04 ; 6439.61,4220.39 cw(c6380.26,4161.04) P16AN.6@6464.19,4161.04 ; P16AN.6@6446.01,4187.47 ccw(c6439.61,4203.31) 6456.69,4203.31 ; P16AN.6@6456.69,4153.54 6456.69,4203.31 ; P16AN.6@6467.37,4187.47 cw(c6473.78,4203.31) 6456.69,4203.31 ; C35.1@6593.57,5271.72 cw(c6571.19,5240) 6610,5240 ; C35.1@6610,5295 6610,5240 ; C35.1@6626.43,5271.72 ccw(c6648.81,5240) 6610,5240 ; 6456.69,4203.31 6140,4520 6140,4775 6225,4860 6705,4860 6870,5025 7035,5025 7100,5090 7100,5175 7015,5260 6895,5260 6815,5180 6670,5180 6610,5240
EB-R_: C1.1 P16AN.4 R40.1 | length 3116.4
  Top Layer w18: C1.1@5580,6025 5660.94,6025 ; C1.1@5587.97,6025 cw(c5587.97,5897.93) R40.1@5677.82,5987.78 ; C1.1@5589.66,5995.89 cw(c5633.71,5977.12) 5633.71,6025 ; C1.1@5606.22,5988.83 cw(c5660.94,5965.52) 5660.94,6025 ; 5631.43,6025 cw(c5631.43,5941.39) R40.1@5690.55,6000.51 ; R40.1@5663.44,6022.51 cw(c5641.84,6000.91) R40.1@5672.39,6000.91 ; R40.1@5685.69,6018.7 cw(c5678.61,6042.66) 5660.95,6025 ; R40.1@5690.94,5995 5660.94,6025 ; v1(6110,4285) 6190,4285 6256.69,4218.31 ; v1@6124.85,4270.15 cw(c6160.7,4234.3) 6160.7,4285 cw(c6160.7,4335.7) v1@6124.85,4299.85 ; P16AN.4@6239.51,4183.78 ccw(c6213.42,4218.31) 6256.69,4218.31 ; P16AN.4@6256.69,4153.54 6256.69,4218.31 ; P16AN.4@6273.88,4183.78 cw(c6299.97,4218.31) 6256.69,4218.31
  Bottom Layer w18: C1.1@5559.85,5979.85 cw(c5511.19,5931.19) 5580,5931.19 cw(c5648.81,5931.19) C1.1@5600.15,5979.85 ; C1.1@5580,6000 5580,5305 5805,5080 5880,5080 5985,4975 5985,4550 5930,4495 5930,4395 5985,4340 6055,4340 v1(6110,4285) ; v1@6089,4285 ccw(c6038.3,4285) 6074.15,4320.85 ccw(c6110,4356.7) v1@6110,4306
EB-Y_: C34.1 P16AN.5 R49.1 | length 2618.9
  Top Layer w18: R49.1@5625.93,5294.03 ccw(c5594.25,5325.71) 5639.06,5325.71 ccw(c5683.86,5325.71) R49.1@5652.18,5294.03 ; R49.1@5639.06,5255 5639.06,5354.06 5735,5450 ; 5762.84,5450 cw(c5762.84,5408.79) C34.1@5800.42,5425.69 ; C34.1@5784.01,5418.31 ccw(c5735,5396.27) 5735,5450 ; C34.1@5810,5410 5770,5450 5735,5450 ; v1(6025,4425) 6060,4390 ; v1@6025.36,4404 cw(c6026.18,4356.18) 6060,4390 ; v1@6046,4424.64 ccw(c6093.82,4423.82) 6060,4390 ; P16AN.5@6336.54,4181.2 ccw(c6287.89,4229.85) 6356.69,4229.85 ccw(c6425.5,4229.85) P16AN.5@6376.84,4181.2 ; P16AN.5@6356.69,4153.54 6356.69,4313.31 6280,4390 6060,4390
  Bottom Layer w18: C34.1@5789.85,5409.85 ccw(c5741.19,5361.19) 5741.19,5430 ccw(c5741.19,5498.81) C34.1@5789.85,5450.15 ; C34.1@5810,5430 5730,5430 5685,5385 5685,5265 5815,5135 5880,5135 6025,4990 v1(6025,4425)
FREQ: D22.2 P16AN.7 R46.2 | length 869.8
  Top Layer w18: P16AN.7@6536.54,4181.2 ccw(c6487.89,4229.85) 6556.69,4229.85 ccw(c6625.5,4229.85) P16AN.7@6576.84,4181.2 ; P16AN.7@6556.69,4153.54 6556.69,4241.69 ; D22.2@6576.54,4293.29 cw(c6508.56,4289.83) 6556.69,4241.69 ; D22.2@6608.29,4261.54 ccw(c6604.83,4193.56) 6556.69,4241.69 ; D22.2@6625.5,4295 cw(c6725.55,4295) 6654.81,4365.75 ; D22.2@6643.5,4295 cw(c6787.01,4295) 6685.53,4396.48 ; 6707.29,4418.24 cw(c6749.06,4376.47) R46.2@6749.06,4435.54 ; R46.2@6721.55,4432.49 ccw(c6699.95,4454.09) R46.2@6730.5,4454.09 ; R46.2@6749.06,4460 6610,4320.94 D22.2@6610,4295 6556.69,4241.69
FREQIN: R65.1 R68.2 U13.10 U13.14 | length 3925.5
  Top Layer w18: R65.1@5079.06,5225 5420,5225 5449,5196 5686,5196 5750,5260 5754.09,5260 5755.09,5261 5846,5261 5900,5315 5930,5315 5965,5315 v1(6010,5315) ; R65.1@5092.18,5211.88 cw(c5123.86,5180.19) 5123.86,5225 cw(c5123.86,5269.81) R65.1@5092.18,5238.12 ; U13.10@6426.46,4685 6510,4685 6615,4790 6890,4790 6955,4855 6955,4965 6920,5000 6716.22,5000 6695.22,5021 6644,5021 6630.94,5034.06 ; U13.14@6426.46,4885 6480,4885 6493.09,4898.09 ; U13.14@6463.02,4889.64 ccw(c6470.53,4920.64) 6493.09,4898.09 ; v1@6475,5254 cw(c6475,5203.3) 6510.85,5239.15 cw(c6546.7,5275) v1@6496,5275 ; v1(6475,5275) 6620,5130 ; R68.2@6617.82,5061.88 ccw(c6586.14,5030.19) 6586.14,5075 ccw(c6586.14,5119.81) R68.2@6617.82,5088.12 ; R68.2@6620.52,5053.74 cw(c6607.15,5034.06) 6630.94,5034.06 ; R68.2@6641.37,5053.74 ccw(c6654.74,5034.06) 6630.94,5034.06 ; 5959.3,5315 ccw(c5959.3,5365.7) 5995.15,5329.85 cw(c5959.3,5365.7) 5959.3,5315 ; 5959.3,5315 cw(c5959.3,5264.3) 5995.15,5300.15 ccw(c5959.3,5264.3) 5959.3,5315 ; 6493.09,4898.09 6493.09,4966.3 6473,4986.39 6473,5033.61 6506.39,5067 6517,5067 6525,5075 R68.2@6620,5075 ; R68.2@6620,5075 6620,5130 ; R68.2@6620,5075 R68.2@6630.94,5075 6630.94,5034.06 ; 6620,5130 ccw(c6657.04,5130) 6639.65,5097.29 cw(c6657.04,5130) 6620,5130
  Bottom Layer w18: v1(6010,5315) 6435,5315 v1(6475,5275) ; v1@6024.85,5300.15 cw(c6060.7,5264.3) 6060.7,5315 cw(c6060.7,5365.7) v1@6024.85,5329.85 ; v1@6454,5275 ccw(c6403.3,5275) 6439.15,5310.85 ccw(c6475,5346.7) v1@6475,5296
GND: C1.2 C2.1 C30.2 C31.2 C32.1 C33.1 C34.2 C35.2 C36.2 C38.1 C39.2 C40.2 C41.1 C43.1 C56.2 C60.1 C99.1 D7.1 D22.1 D61.1 P13KB.1 P14PANEL.1 P15RL.10 P16AN.10 PN1.3 PN1.4 R41.2 R44.1 R50.2 R54.1 R59.2 R63.1 R69.2 R72.2 R74.1 R75.2 R81.2 R84.1 R89.2 R92.1 R97.1 R99.1 R106.1 R110.1 R112.1 R114.1 R116.1 R117.1 U12.11 U13.11 U50.3 U50.5 U51.2 | length 32813.7
  Top Layer w18: R89.2@5415.93,4819.31 cw(c5384.25,4787.62) 5429.06,4787.62 cw(c5473.86,4787.62) R89.2@5442.18,4819.31 ; R89.2@5429.06,4838.33 5429.06,4760 5747.61,4760 R92.1@5825.94,4838.33 ; 5784.18,4796.57 cw(c5825.94,4754.81) R92.1@5825.94,4813.87 ; R92.1@5798.44,4810.83 ccw(c5776.84,4832.43) R92.1@5807.39,4832.43 ; U13.11@6426.46,4735 6505,4735 6630.94,4860.94 R74.1@6630.94,4916.25 ; R74.1@6617.82,4897.22 cw(c6586.14,4865.54) 6630.94,4865.54 cw(c6675.75,4865.54) R74.1@6644.07,4897.22 ; C36.2@6989.85,5145.15 ccw(c6941.19,5193.81) 7010,5193.81 ccw(c7078.81,5193.81) C36.2@7030.15,5145.15 ; C36.2@7010,5125 7010,5295 ; R69.2@7284.06,4916.25 7416.25,4916.25 7420,4920 ; R69.2@7297.18,4903.13 cw(c7328.86,4871.44) 7328.86,4916.25 cw(c7328.86,4961.06) R69.2@7297.18,4929.37
  Top Layer w20: R114.1@5416.64,4533.32 ccw(c5386.66,4563.3) 5429.06,4563.3 ccw(c5471.45,4563.3) R114.1@5441.47,4533.32 ; R81.2@5416.64,4658.34 cw(c5386.66,4628.37) 5429.06,4628.37 cw(c5471.45,4628.37) R81.2@5441.47,4658.34 ; R81.2@5416.64,4694.99 ccw(c5386.66,4724.96) 5429.06,4724.96 ccw(c5471.45,4724.96) R81.2@5441.47,4694.99 ; R89.2@5416.64,4820.01 cw(c5386.66,4790.04) 5429.06,4790.04 cw(c5471.45,4790.04) R89.2@5441.47,4820.01 ; R114.1@5429.06,4515 R81.2@5429.06,4676.67 5429.06,4760 ; R92.1@5825.94,4814.87 cw(c5825.94,4758.22) 5866,4798.28 ; R92.1@5825.94,4838.33 5944.06,4720.22 R84.1@5944.06,4695 ; R92.1@5843.5,4832.43 ccw(c5871.64,4832.43) R92.1@5851.74,4812.53 ; 5900.42,4763.86 cw(c5837.47,4700.91) R84.1@5926.5,4700.91 ; 5934.56,4729.71 cw(c5905.76,4700.91) R84.1@5946.5,4700.91 ; C33.1@6113.26,5425.8 cw(c6093.36,5405.91) C33.1@6121.5,5405.91 ; C33.1@6138.97,5423.46 cw(c6138.71,5479.27) 6099.25,5439.81 ; C33.1@6139.06,5376.54 cw(c6139.06,5319.89) 6179.11,5359.94 ; U12.11@6140.97,5666.22 ccw(c6140.24,5608.25) 6099.25,5649.25 ; C33.1@6156.61,5394.09 ccw(c6184.75,5394.09) C33.1@6164.86,5374.2 ; R63.1@6348.53,5677.58 ccw(c6318.55,5647.61) 6318.55,5690 ccw(c6318.55,5732.39) R63.1@6348.53,5702.42 ; 6357.22,4752.78 ccw(c6391.02,4786.59) U13.11@6391.02,4738.78 ; R63.1@6360.94,5690 6305,5690 6285,5670 U12.11@6176.46,5670 6120,5670 6099.24,5649.24 ; C2.1@6363.26,4954.2 ccw(c6343.36,4974.09) C2.1@6371.5,4974.09 ; v1@6364.53,5154.53 ccw(c6316.24,5154.53) 6350.39,5188.67 ccw(c6384.53,5222.81) v1@6384.53,5174.53 ; C2.1@6376.64,4998.32 ccw(c6357.6,5017.37) 6384.53,5017.37 ; 6384.53,5039.23 ccw(c6442.38,5039.23) C2.1@6401.47,4998.32 ; C2.1@6388.97,4956.54 ccw(c6388.71,4900.73) 6349.25,4940.19 ; C2.1@6389.06,4980 C2.1@6384.53,4975.47 ; U13.11@6426.46,4735 6375,4735 6349.24,4760.76 6349.24,4940.19 ; C35.2@6710,5295 7010,5295 7010,5355 7065,5410 7065,5579.06 R59.2@6984.06,5660 ; C35.2@6729.45,5275.55 cw(c6776.39,5228.61) 6776.39,5295 cw(c6776.39,5361.39) C35.2@6729.45,5314.45 ; R75.2@6736.64,4593.32 ccw(c6706.66,4623.3) 6749.06,4623.3 ccw(c6791.45,4623.3) R75.2@6761.47,4593.32 ; R72.2@6736.64,4676.68 cw(c6706.66,4646.7) 6749.06,4646.7 cw(c6791.45,4646.7) R72.2@6761.47,4676.68 ; R75.2@6749.06,4575 R72.2@6749.06,4695 ; R112.1@6865.94,5520 6865.94,5541.89 R59.2@6984.06,5660 ; R112.1@6883.5,5525.91 cw(c6964.48,5525.91) 6907.22,5583.16 ; 6944,5619.94 cw(c6984.06,5579.89) 6984.06,5636.54 cw(c6984.06,5579.89) 7024.11,5619.94 ; R59.2@6958.26,5634.2 ccw(c6938.36,5654.09) R59.2@6966.5,5654.09 ; R59.2@6984.06,5683.46 ccw(c6984.06,5740.11) 7024.11,5700.06 ; R59.2@7001.61,5654.09 ccw(c7029.75,5654.09) R59.2@7009.86,5634.2 ; R59.2@7001.61,5665.91 cw(c7029.75,5665.91) R59.2@7009.86,5685.8 ; 7046.17,5722.11 ccw(c6928.28,5840) R117.1@7095,5840 ; 7080.31,5756.26 ccw(c6996.57,5840) R117.1@7115,5840 ; 7114.45,5790.4 ccw(c7064.85,5840) R117.1@7135,5840 7135,5810.94 R59.2@6984.06,5660 ; 7116.32,5792.26 cw(c7135,5773.58) R117.1@7135,5800 ; 6099.24,5439.81 6099.24,5649.24 ; 6099.24,5439.81 C33.1@6139.06,5400 6149.06,5390 v1(6384.53,5154.53) C2.1@6384.53,4975.47 ; 6349.24,4940.19 C2.1@6384.53,4975.47 ; 6384.53,5106.24 ccw(c6336.24,5106.24) 6370.39,5140.39 cw(c6336.24,5106.24) 6384.53,5106.24 ; 6384.53,5106.24 cw(c6432.81,5106.24) 6398.67,5140.39 ccw(c6432.81,5106.24) 6384.53,5106.24
  Top Layer w22: R50.2@4924.06,5548.33 4943.33,5548.33 5005,5610 5005.8,5610.8 5180.8,5610.8 5224.06,5654.06 R41.2@5224.06,5655.94 ; v1@5028.44,5596.56 cw(c5062.8,5562.2) 5062.8,5610.8 ; v1@5028.44,5623.44 ccw(c5058.94,5653.94) 5058.94,5610.8 ; 5183.98,5613.98 ccw(c5127.19,5670.76) R41.2@5207.5,5670.76 ; R41.2@5212.35,5694.28 ccw(c5184.08,5722.55) 5224.06,5722.55 ccw(c5264.03,5722.55) R41.2@5235.76,5694.28 ; R97.1@5212.35,5822.39 cw(c5184.08,5794.12) 5224.06,5794.12 cw(c5264.03,5794.12) R97.1@5235.76,5822.39 ; R97.1@5224.06,5840 R41.2@5224.06,5676.67 R41.2@5224.06,5655.94 ; R41.2@5240.61,5670.76 ccw(c5316.36,5670.76) 5262.8,5617.2 ; 5481.78,5598.22 cw(c5437.8,5554.24) R54.1@5500,5554.24 ; R54.1@5516.56,5570.8 ccw(c5516.56,5625.03) 5554.91,5586.68 ; R54.1@5533.11,5554.24 cw(c5558.83,5554.24) R54.1@5540.65,5572.43 ; R44.1@5679.24,5664.96 ccw(c5650.97,5636.69) 5650.97,5676.67 ccw(c5650.97,5716.64) R44.1@5679.24,5688.37 ; R44.1@5690.94,5676.67 5644.89,5676.67 R54.1@5516.56,5548.33 5516.56,5563.44 5469.2,5610.8 5269.2,5610.8 R41.2@5224.06,5655.94 ; R50.2@4924.06,5548.8 ccw(c4924.06,5596.46) 4957.76,5562.76 cw(c4924.06,5596.46) R50.2@4924.06,5548.8 ; R50.2@4924.06,5570.8 ccw(c4924.06,5671.57) 4995.31,5600.31 cw(c4924.06,5671.57) R50.2@4924.06,5570.8 ; 4965.49,5570.49 cw(c5015,5520.99) 5015,5591 ccw(c5015,5520.99) 4965.49,5570.49 ; 4971.51,5586.57 cw(c4996.92,5542.54) 5010.08,5591.65 ccw(c4996.92,5542.54) 4971.51,5586.57 ; 4977.59,5590.08 ccw(c4957.14,5625.5) 4996.65,5614.92 cw(c4957.14,5625.5) 4977.59,5590.08
  Top Layer w32: P14PANEL.1@4153.54,6355.91 4309.09,6355.91 4460,6205 4945,6205 5050,6310 C30.2@5050,6475 5050,6590 5190,6730 5245,6730 ; P14PANEL.1@4176.25,6340.7 cw(c4212.95,6304) 4212.95,6355.91 cw(c4212.95,6407.81) P14PANEL.1@4176.25,6371.11 ; P14PANEL.1@4193.03,6355.91 ccw(c4193.03,6456.97) D7.1@4264.49,6385.51 ; 4236.94,6355.91 cw(c4236.94,6316.94) D7.1@4264.49,6344.49 ; D7.1@4285,6336 cw(c4285,6229.77) 4360.11,6304.89 ; D7.1@4314,6365 ccw(c4347.8,6365) 4323.9,6341.1 ; R110.1@4915.88,5414.08 ccw(c4896.15,5433.81) 4924.06,5433.81 ccw(c4951.96,5433.81) R110.1@4932.23,5414.08 ; R50.2@4915.88,5534.26 cw(c4896.15,5514.52) 4924.06,5514.52 cw(c4951.96,5514.52) R50.2@4932.23,5534.26 ; R110.1@4924.06,5400 R50.2@4924.06,5548.33 ; C30.2@5029.49,6454.49 cw(c4979.99,6404.99) 5050,6404.99 cw(c5120.01,6404.99) C30.2@5070.51,6454.49 ; C30.2@5029.49,6495.51 ccw(c4979.99,6545.01) 5050,6545.01 ccw(c5120.01,6545.01) C30.2@5070.51,6495.51 ; P15RL.10@5265.11,6847.38 cw(c5228.41,6810.67) 5280.32,6810.67 cw(c5332.22,6810.67) P15RL.10@5295.52,6847.38 ; P15RL.10@5280.32,6870.08 5280.32,6765.32 5245,6730 ; 5598.15,6730 ccw(c5598.15,6771.89) R106.1@5627.77,6742.27 ; R106.1@5635.94,6740 5625.94,6730 5245,6730 ; U51.2@6654.8,6722.7 ccw(c6618.09,6759.41) 6670,6759.41 ccw(c6721.91,6759.41) U51.2@6685.2,6722.7 ; U51.2@6670,6695 6670,6875.94 C41.1@6674.06,6880 ; 6670,6836.4 cw(c6711.75,6836.4) C41.1@6682.23,6865.92 ; C41.1@6682.23,6871.83 cw(c6701.96,6852.09) 6701.96,6880 cw(c6701.96,6907.91) C41.1@6682.23,6888.17 ; C41.1@6685.62,6885.91 cw(c6757.34,6885.91) 6706.62,6936.62 ; C99.1@6747.77,6871.83 ccw(c6728.04,6852.09) 6728.04,6880 ccw(c6728.04,6907.91) C99.1@6747.77,6888.17 ; C99.1@6755.94,6880 C41.1@6674.06,6880 ; 7064.45,6985.62 cw(c6956.41,6877.58) PN1.4@7109.21,6877.58 ; 7094.64,6955.44 ccw(c7230.71,7091.51) PN1.3@7230.71,6899.08 ; 7114.98,6942.17 cw(c7081.34,6890.61) PN1.4@7140.86,6874.9 ; PN1.4@7115.51,6854.88 ccw(c7078.8,6818.17) 7078.8,6870.08 ccw(c7078.8,6921.98) PN1.4@7115.51,6885.28 ; 7119.08,6931 cw(c7065.66,6877.58) PN1.4@7141.21,6877.58 ; C31.2@7124.49,6504.49 ccw(c7074.99,6454.99) 7074.99,6525 ccw(c7074.99,6595.01) C31.2@7124.49,6545.51 ; C31.2@7144.62,6527.98 cw(c7152.08,6469.36) 7193.86,6511.14 ; PN1.4@7145.91,6854.88 cw(c7182.61,6818.17) 7182.61,6870.08 cw(c7182.61,6921.98) PN1.4@7145.91,6885.28 ; C31.2@7148.66,6496.23 cw(c7162.49,6387.5) 7240,6465 ; PN1.4@7149.27,6900.81 ccw(c7230.71,6982.26) PN1.3@7230.71,6867.08 ; PN1.3@7215.51,6854.88 ccw(c7178.8,6818.17) 7178.8,6870.08 ccw(c7178.8,6921.98) PN1.3@7215.51,6885.28 ; PN1.3@7230.71,6870.08 7180,6870.08 ; 7420,6465 7240,6465 ; 7435,6465 7479.06,6509.06 C32.1@7479.06,6570 C43.1@7479.06,6665 ; C32.1@7470.88,6555.92 cw(c7451.15,6536.19) 7479.06,6536.19 cw(c7506.96,6536.19) C32.1@7487.23,6555.92 ; C32.1@7470.88,6584.08 ccw(c7451.15,6603.81) 7479.06,6603.81 ccw(c7506.96,6603.81) C32.1@7487.23,6584.08 ; C43.1@7470.88,6650.92 cw(c7451.15,6631.19) 7479.06,6631.19 cw(c7506.96,6631.19) C43.1@7487.23,6650.92 ; C41.1@6674.06,6880 6674.06,6904.06 6765,6995 7055.08,6995 7180,6870.08 ; 7180,6870.08 ccw(c7180,6919.12) 7215.25,6885.03 cw(c7180,6919.12) 7180,6870.08 ; 7180,6870.08 cw(c7180,6821.04) 7215.25,6855.13 ccw(c7180,6821.04) 7180,6870.08 ; 7180,6870.08 ccw(c7180,6824.33) 7146.47,6855.45 cw(c7180,6824.33) 7180,6870.08 ; 7180,6870.08 cw(c7180,6915.83) 7146.47,6884.7 ccw(c7180,6915.83) 7180,6870.08 ; 7180,6870.08 PN1.4@7130.71,6870.08 7075.08,6870.08 7010,6805 7010,6570 7055,6525 C31.2@7145,6525 7180,6525 7240,6465
  Top Layer w40: R99.1@4569.06,5225 4569.06,5269.06 v1(4620,5320) ; R99.1@4576.61,5230.91 cw(c4686.97,5230.91) v1@4608.94,5308.94 ; 4599.53,5292.65 cw(c4632.42,5273.67) v1@4622.59,5310.34 ; v1@5005,5610 v1(5015,5610) ; R114.1@5429.06,4515 5430,4514.06 v1(5430,4425) ; R116.1@5429.06,5000 5430,5000.94 v1(5430,5090) ; C33.1@6144.4,5399.44 ccw(c6167.19,5422.23) 6167.19,5390 ; C33.1@6149.06,5390 v1(6230,5390) ; R75.2@6749.06,4575 6855,4575 6910,4520 D22.1@6910,4295 6856.69,4241.69 P16AN.10@6856.69,4153.54 7228.54,4153.54 7420,4345 C38.1@7420,4750.94 ; P16AN.10@6844.32,4173.42 ccw(c6814.44,4203.29) 6856.69,4203.29 ccw(c6898.94,4203.29) P16AN.10@6869.07,4173.42 ; P16AN.10@6869.07,4141.17 cw(c6898.94,4111.3) 6898.94,4153.54 cw(c6898.94,4195.79) P16AN.10@6869.07,4165.92 ; D22.1@6887.5,4295 cw(c6833.18,4295) 6871.59,4256.59 cw(c6910,4218.18) D22.1@6910,4272.5 ; D22.1@6894.09,4310.91 ccw(c6855.68,4349.32) 6910,4349.32 ccw(c6964.32,4349.32) D22.1@6925.91,4310.91 ; R117.1@7113.79,5861.21 ccw(c7062.57,5912.43) 7135,5912.43 ccw(c7207.43,5912.43) R117.1@7156.21,5861.21 ; R117.1@7135,5840 7135,5925.94 C60.1@7265,6055.94 ; C60.1@7242.01,6032.96 ccw(c7219.03,6055.94) C60.1@7251.54,6055.94 ; v2(7270,5690) 7420,5690 ; v2@7287.68,5672.32 cw(c7330.36,5629.64) 7330.36,5690 cw(c7330.36,5750.36) v2@7287.68,5707.68 ; 7420,6465 7420,5690 ; P13KB.1@7637.61,4643.53 ccw(c7607.73,4613.66) 7607.73,4655.91 ccw(c7607.73,4698.15) P13KB.1@7637.61,4668.28 ; P13KB.1@7657.48,4655.91 7444.09,4655.91 7420.94,4679.06 C38.1@7420.94,4750 C38.1@7420,4750.94 ; C38.1@7420,4750.94 7420,4920 7420,5690
  Bottom Layer w20: C40.2@6165,5150 6380,5150 v1(6384.53,5154.53) ; C40.2@6184.45,5130.55 cw(c6231.39,5083.61) 6231.39,5150 cw(c6231.39,5216.39) C40.2@6184.45,5169.45 ; 6325.31,5150 ccw(c6325.31,5213.74) v1@6370.39,5168.67 ; 6347.18,5150 cw(c6347.18,5117.18) v1@6370.39,5140.39
  Bottom Layer w32: P14PANEL.1@4153.54,6355.91 4162.64,6365 D7.1@4270,6365 ; P14PANEL.1@4176.25,6340.7 cw(c4234.9,6282.05) 4234.9,6365 ; D7.1@4264.49,6344.49 ccw(c4214.99,6294.99) 4214.99,6365 ccw(c4214.99,6435.01) D7.1@4264.49,6385.51 ; C30.2@5029.49,6454.49 cw(c4979.99,6404.99) 5050,6404.99 cw(c5120.01,6404.99) C30.2@5070.51,6454.49 ; C30.2@5050,6475 5050,6305 5185,6170 5575,6170 5625,6220 U50.3@5625,6296.26 U50.5@5758.86,6296.26 5758.86,6261.14 5820,6200 ; U50.3@5604.49,6275.75 cw(c5554.99,6226.25) 5625,6226.25 cw(c5695.01,6226.25) 5645.51,6275.75 cw(c5695.01,6226.25) 5695.01,6296.26 cw(c5695.01,6366.27) U50.3@5645.51,6316.77 ; U50.5@5738.35,6275.75 ccw(c5688.85,6226.25) 5688.85,6296.26 ccw(c5688.85,6366.27) U50.5@5738.35,6316.77 ; U50.5@5755.88,6296.61 ccw(c5816.05,6289.62) 5773.22,6246.78 ; U50.5@5787.66,6292.91 ccw(c5899.87,6279.88) 5820,6200 ; D61.1@5904.49,6179.49 ccw(c5854.99,6129.99) 5854.99,6200 ccw(c5854.99,6270.01) D61.1@5904.49,6220.51 ; D61.1@5925,6171 cw(c5925,6100.99) 5974.51,6150.49 cw(c6024.01,6200) D61.1@5954,6200 ; C56.2@6641,5965 ccw(c6558.92,5965) 6616.96,6023.04 ccw(c6675,6081.08) C56.2@6675,5999 ; U51.2@6654.8,6667.3 cw(c6618.09,6630.59) 6670,6630.59 cw(c6721.91,6630.59) U51.2@6685.2,6667.3 ; U51.2@6670,6695 6670,6575 6815,6430 6815,5965 ; C56.2@6699.04,5940.96 cw(c6757.08,5882.92) 6757.08,5965 cw(c6757.08,6047.08) C56.2@6699.04,5989.04 ; 6966,5944 ccw(c7135,6113.01) R117.1@7135,5874 ; 7020.62,5889.38 ccw(c7135,6003.75) R117.1@7135,5842 ; 7075.25,5834.75 ccw(c7135,5894.5) R117.1@7135,5810 ; R117.1@7107.07,5820.61 ccw(c7070,5794.87) 7070,5840 ; R117.1@7107.07,5859.39 cw(c7070,5885.13) 7070,5840 ; R117.1@7135,5840 7070,5840 ; 5820,6200 D61.1@5925,6200 5995,6130 6510,6130 C56.2@6675,5965 6815,5965 ; 6815,5965 6945,5965 7070,5840
  Bottom Layer w40: v1@4615,5320 v1(4620,5320) 4990,5320 ; 4990,5525.5 cw(c5099.5,5525.5) v1@5022.07,5602.93 ; v1@5025,5610 cw(c5061.21,5610) 5035.61,5635.61 ; 5425,4388.79 cw(c5466.21,4388.79) v1@5437.07,4417.93 ; v1@5430,5095 v1(5430,5090) ; C1.2@5467.63,5987.63 cw(c5437.75,5957.75) 5480,5957.75 cw(c5522.25,5957.75) C1.2@5492.37,5987.63 ; C1.2@5480,6000 5480,5775 5360,5655 5055,5655 4990,5590 4990,5320 ; C39.2@5602.63,4202.63 ccw(c5572.75,4172.75) 5572.75,4215 ccw(c5572.75,4257.25) C39.2@5602.63,4227.37 ; C39.2@5615,4197.5 cw(c5615,4082.82) 5696.09,4163.91 ; C34.2@5810,5330 5816.77,5330 5876.77,5390 v1(6230,5390) 6350,5390 6650,5690 v2(7270,5690) ; C34.2@5810,5347.5 ccw(c5810,5406.1) 5851.44,5364.66 ; P16AN.10@6844.32,4133.67 cw(c6814.44,4103.8) 6856.69,4103.8 cw(c6898.94,4103.8) P16AN.10@6869.07,4133.67 ; P16AN.10@6856.69,4153.54 6856.69,4086.69 6805,4035 5825,4035 5645,4215 C39.2@5615,4215 5500,4215 5425,4290 5425,4420 v1(5430,4425) v1(5430,5090) ; v2@7252.32,5672.32 ccw(c7209.64,5629.64) 7209.64,5690 ccw(c7209.64,5750.36) v2@7252.32,5707.68 ; 4990,5320 5200,5320 v1(5430,5090)